# EAGLE board ic2_extention (EAGLE 9.1.3)
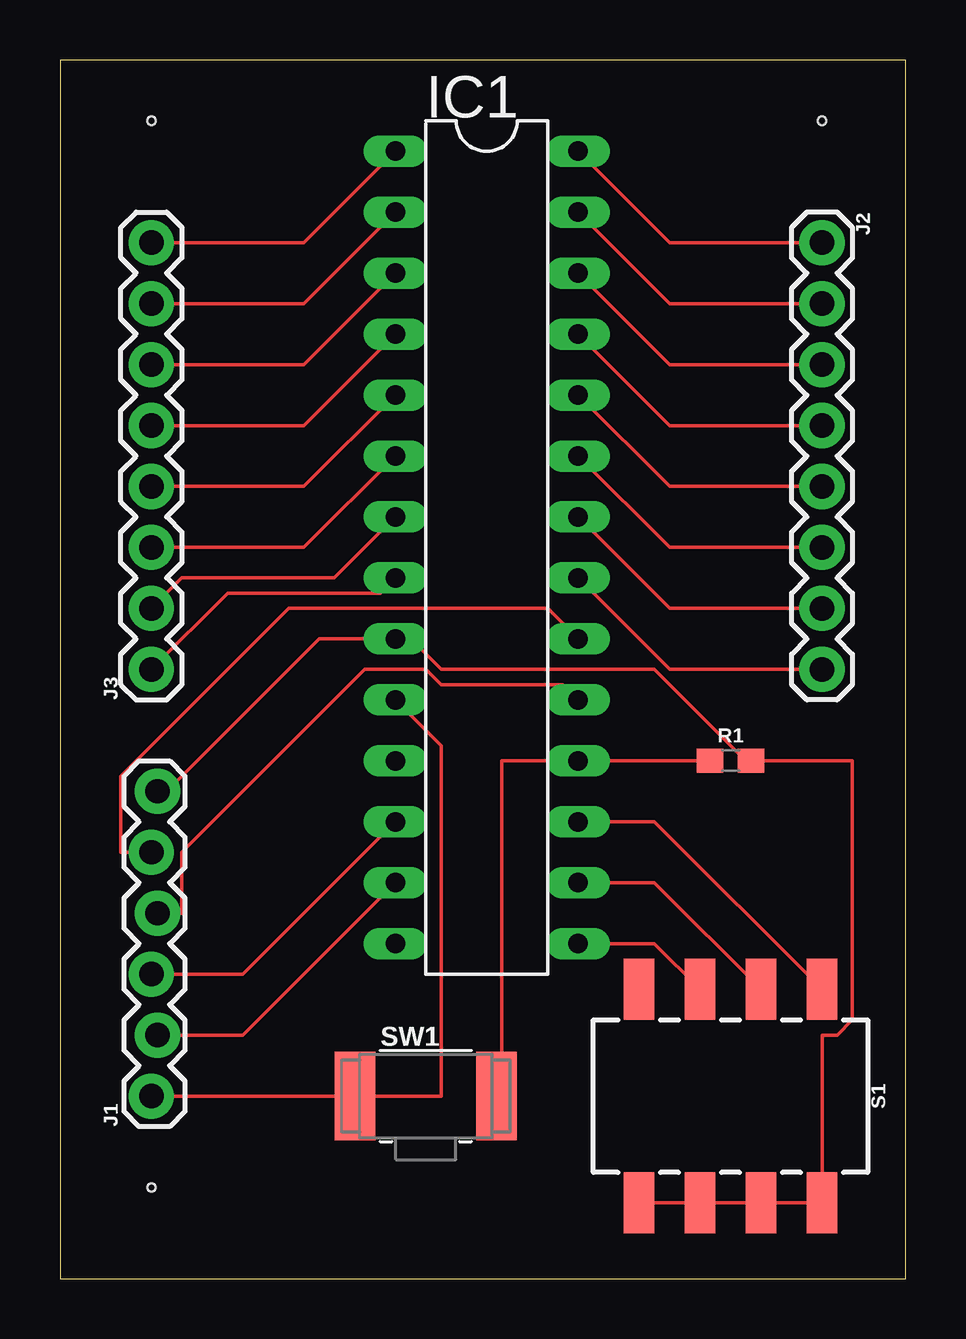
[diagram p0: board, top side]

Size 35.23 x 50.79 mm. Coordinates in mm from the lower left corner, seen from the top.
Outline: 0,0 35.23,0 35.23,50.79 0,50.79 0,0
Copper layers (1*16): Top 0.035mm / dielectric 1.5mm / Bottom 0.035mm
Design rules "default": minimum track width 6mil, minimum drill 0.35mm, track to track 6mil, track to pad 6mil, pad to pad 6mil, via to via 6mil, smd to smd 6mil, copper to edge 40mil, drill to drill 6mil, minimum pad ring 10mil, minimum via ring 8mil, stop-mask expansion 4mil, vias tented up to drill 0mil, thermal gap 10mil
Holes 0.35 mm at 3.81,3.81 3.81,48.26 31.75,48.26

## Footprints (pad centres in the part's own frame; a part is rotated, then mirrored left to right if it is on the bottom)
DIL28-3 = drill 0.813 long: 1 -16.51,-3.81; 2 -13.97,-3.81; 3 -11.43,-3.81; 4 -8.89,-3.81; 5 -6.35,-3.81; 6 -3.81,-3.81; 7 -1.27,-3.81; 8 1.27,-3.81; 9 3.81,-3.81; 10 6.35,-3.81; 11 8.89,-3.81; 12 11.43,-3.81; 13 13.97,-3.81; 14 16.51,-3.81; 15 16.51,3.81; 16 13.97,3.81; 17 11.43,3.81; 18 8.89,3.81; 19 6.35,3.81; 20 3.81,3.81; 21 1.27,3.81; 22 -1.27,3.81; 23 -3.81,3.81; 24 -6.35,3.81; 25 -8.89,3.81; 26 -11.43,3.81; 27 -13.97,3.81; 28 -16.51,3.81
1X06_LOCK = drill 1.016 pad 1.88: 1 0,0; 2 2.54,-0.254; 3 5.08,0; 4 7.62,-0.254; 5 10.16,0; 6 12.7,-0.254
1X08 = drill 1.016 pad 1.88: 1 0,0; 2 2.54,0; 3 5.08,0; 4 7.62,0; 5 10.16,0; 6 12.7,0; 7 15.24,0; 8 17.78,0
0603 = smd 1.1 x 1: 1 -0.85,0; 2 0.85,0
DIPSWITCH-04-SMD = smd 1.27 x 2.54: 1 -3.81,4.445; 2 -1.27,4.445; 3 1.27,4.445; 4 3.81,4.445; 5 3.81,-4.445; 6 1.27,-4.445; 7 -1.27,-4.445; 8 -3.81,-4.445
BTN_CK_KSS = smd 1.7 x 3.7: P$1 -2.95,0; P$2 2.95,0

## Placement (x,y rotation side)
IC1  MCP23017SP  [DIL28-3]  17.78,30.48 270 top
J1  Input  [1X06_LOCK]  3.81,7.62 90 top
J2  BankA  [1X08]  31.75,43.18 270 top
J3  BankB  [1X08]  3.81,25.4 90 top
R1  10k  [0603]  27.94,21.59 0 top
S1  DIP-04SMD  [DIPSWITCH-04-SMD]  27.94,7.62 180 top
SW1  Reset  [BTN_CK_KSS]  15.24,7.62 0 top

## Library data of the parts
IC1 SW1 = adafruit
J1 = SparkFun-Connectors
J2 J3 = SparkFun-Connectors; PROD_ID: CONN-08438
R1 = SparkFun-Resistors; PROD_ID: RES-00824
S1 = SparkFun-Switches; PROD_ID: SWCH-12418

## Nets
A0: IC1.15 S1.6
A1: IC1.16 S1.7
A2: IC1.17 S1.8
GND: IC1.10 J1.1 SW1.P$1
N$7: IC1.18 R1.1 SW1.P$2
N$9: IC1.20 J1.5
N$10: IC1.19 J1.4
N$12: IC1.28 J2.1
N$13: IC1.27 J2.2
N$14: IC1.26 J2.3
N$15: IC1.25 J2.4
N$16: IC1.24 J2.5
N$17: IC1.23 J2.6
N$18: IC1.22 J2.7
N$19: IC1.21 J2.8
N$20: IC1.8 J3.1
N$21: IC1.7 J3.2
N$22: IC1.6 J3.3
N$23: IC1.5 J3.4
N$24: IC1.4 J3.5
N$25: IC1.3 J3.6
N$26: IC1.2 J3.7
N$27: IC1.1 J3.8
N$28: IC1.12 J1.3
N$29: IC1.13 J1.2
VDD: IC1.9 J1.6 R1.2 S1.1 S1.2 S1.3 S1.4

## Tracks (layer width: path | path; a pad name or v marks a point on that pad's centre or on a via)
A0
  Top 0.152: S1.6 24.77,13.97 IC1.15
A1
  Top 0.152: S1.7 24.77,16.51 IC1.16
A2
  Top 0.152: S1.8 24.77,19.05 IC1.17
GND
  Top 0.152: IC1.10 15.88,22.23 15.88,7.62 12.7,7.62 SW1.P$1 12.06,7.62 J1.1
N$7
  Top 0.152: R1.1 26.67,21.59 IC1.18 18.41,21.59 18.41,7.62 SW1.P$2
N$9
  Top 0.152: IC1.20 20.32,27.94 9.53,27.94 2.54,20.95 2.54,17.78 J1.5
N$10
  Top 0.152: IC1.19 20.95,24.77 15.88,24.77 15.24,25.4 12.7,25.4 5.08,17.78 5.08,15.24 4.45,15.24 J1.4
N$12
  Top 0.152: IC1.28 25.4,43.18 J2.1
N$13
  Top 0.152: IC1.27 25.4,40.64 J2.2
N$14
  Top 0.152: IC1.26 25.4,38.1 J2.3
N$15
  Top 0.152: IC1.25 25.4,35.56 J2.4
N$16
  Top 0.152: IC1.24 25.4,33.02 J2.5
N$17
  Top 0.152: IC1.23 25.4,30.48 J2.6
N$18
  Top 0.152: IC1.22 25.4,27.94 J2.7
N$19
  Top 0.152: IC1.21 25.4,25.4 J2.8
N$20
  Top 0.152: IC1.8 13.34,28.57 6.99,28.57 J3.1
N$21
  Top 0.152: IC1.7 11.43,29.21 5.08,29.21 J3.2
N$22
  Top 0.152: IC1.6 10.16,30.48 J3.3
N$23
  Top 0.152: IC1.5 10.16,33.02 J3.4
N$24
  Top 0.152: IC1.4 10.16,35.56 J3.5
N$25
  Top 0.152: IC1.3 10.16,38.1 J3.6
N$26
  Top 0.152: IC1.2 10.16,40.64 J3.7
N$27
  Top 0.152: IC1.1 10.16,43.18 J3.8
N$28
  Top 0.152: IC1.12 7.62,12.7 J1.3
N$29
  Top 0.152: IC1.13 7.62,10.16 4.45,10.16 J1.2
VDD
  Top 0.152: S1.4 S1.3 S1.2 S1.1 31.75,10.16 32.38,10.16 33.02,10.79 33.02,21.59 29.21,21.59 R1.2 28.57,21.59 24.77,25.4 15.88,25.4 14.61,26.67 IC1.9 10.79,26.67 4.45,20.32 J1.6